# Altium PCB PCB2(SMA).PcbDoc
Units mm, origin at the board's own origin, x right, y up, seen from the top; angles counter-clockwise.
Board outline 112 x 58 mm, 2 copper layers (Top Layer, Bottom Layer), stack 1.57 mm thick; 106 components, 78 nets, 440 pads, 187 vias.
Unrouted connection lines stored in the file: 13.
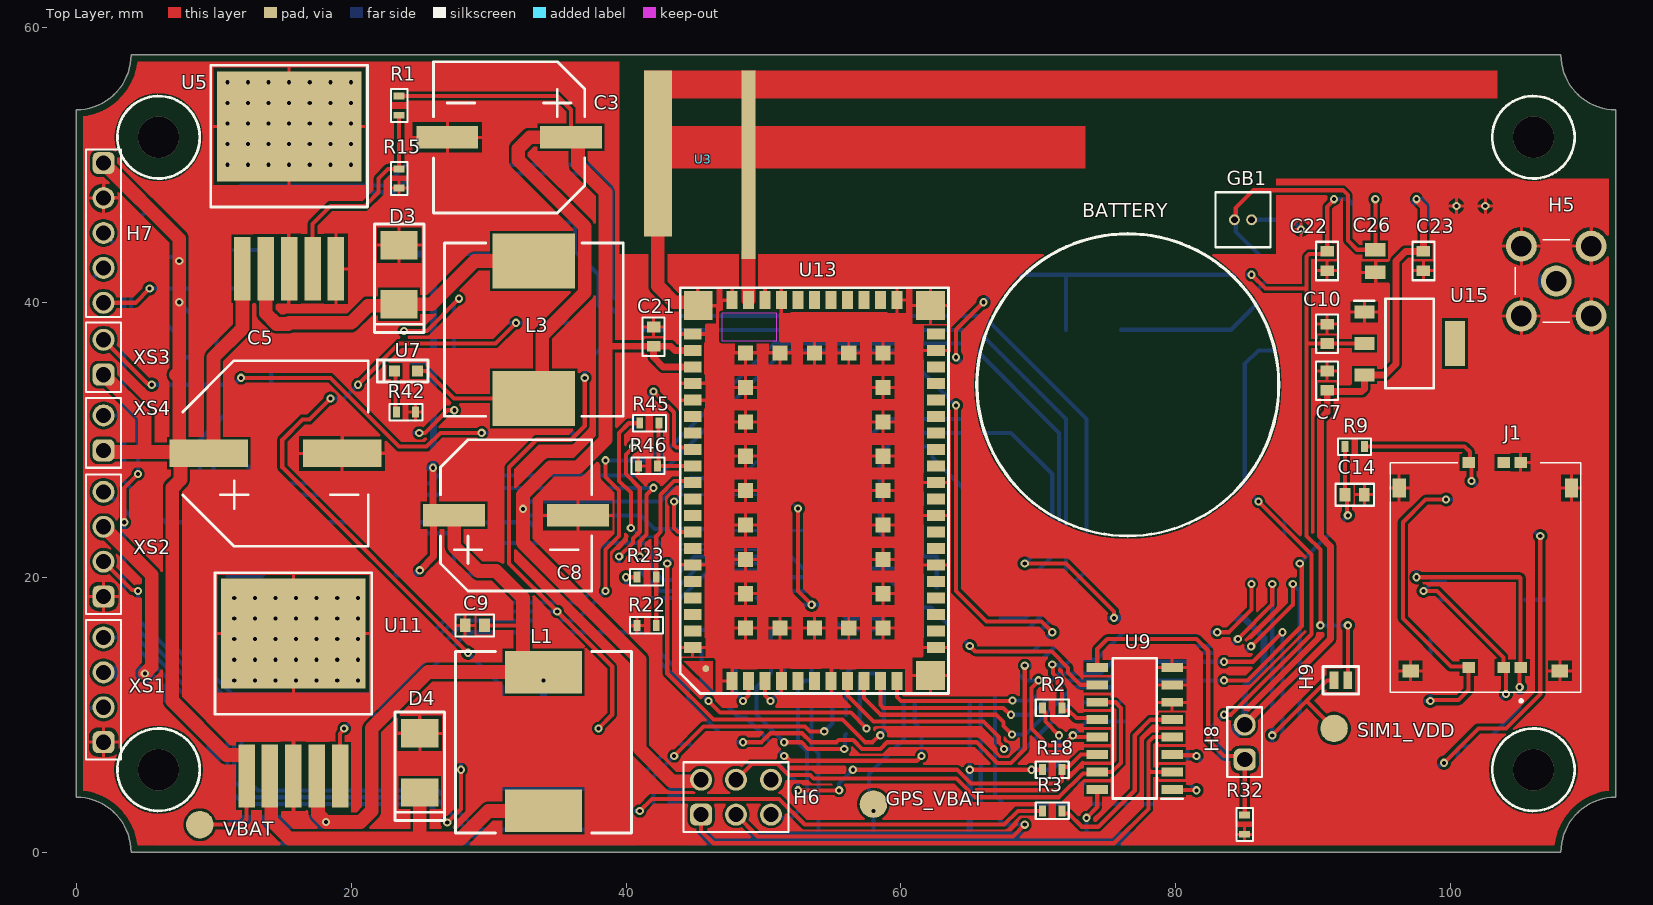
[diagram p0: Top Layer view]
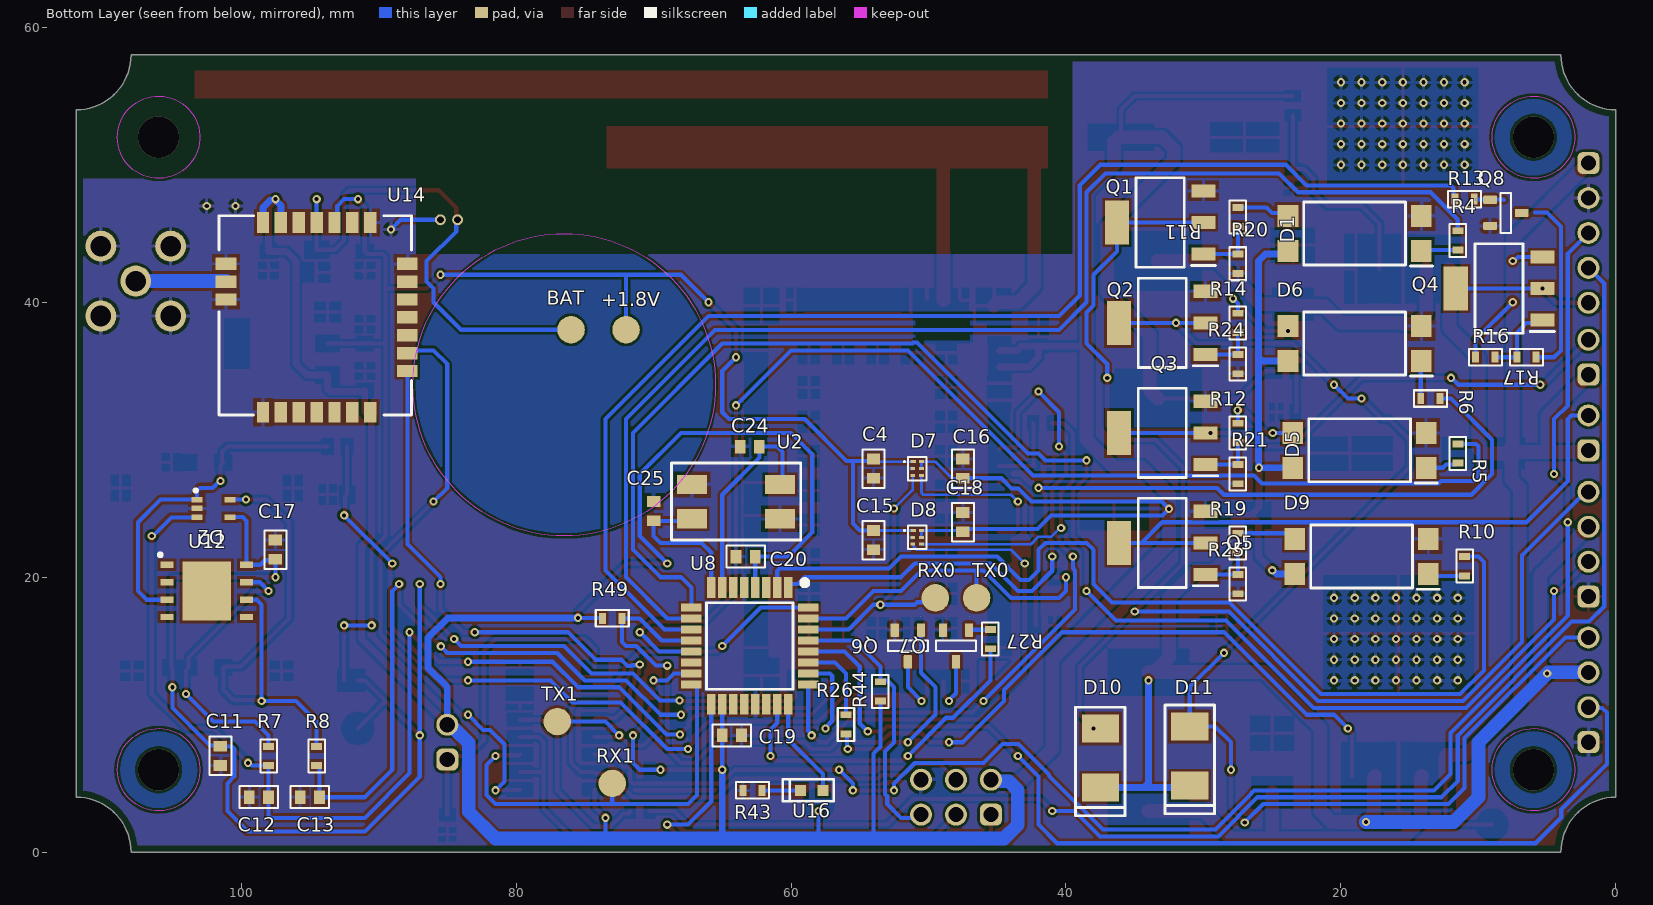
[diagram p1: Bottom Layer view, seen from below]

## Layer stack, top to bottom
Top Solder: solder mask 0.0102, Solder Resist, Dk 3.5
Top Layer: signal copper 0.035
Dielectric 1: dielectric 1.5, FR-4, Dk 4.8
Bottom Layer: signal copper 0.035
Bottom Solder: solder mask 0.0102, Solder Resist, Dk 3.5

## Board outline
0,4 cw(c0,0) 4,0 108,0 cw(c112,0) 112,4 112,54 cw(c112,58) 108,58 4,58 cw(c0,58) 0,54

## Design rules (kind name [scope] priority, off if disabled: settings)
BoardOutlineClearance [All] p1: gap=0.5 ignorepadtopadclearanceinfootprint=FALSE
Clearance [All] p1: gap=0.2 ignorepadtopadclearanceinfootprint=FALSE except(0: Arc-Hole Track-Hole SMDPad-Hole THPad-Hole Via-Hole Fill-Hole Poly-Hole Region-Hole Text-Hole)
HoleSize [All] p1: absolutevalues=TRUE maxlimit=3 minlimit=0.3 maxpercent=80.000 minpercent=20.000
PolygonConnect [All] p1: connectstyle=Relief reliefconductorwidth=0.254 reliefentries=4 polygonreliefangle="90 Angle" airgapwidth=0.254
RoutingVias [All] p1: holewidth=0.711 width=1.27 viastyle="Through Hole" minholewidth=0.3 minwidth=0.6 maxholewidth=0.711 maxwidth=1.27
SolderMaskExpansion [All] p1: expansion=0.102 istentingtop=FALSE
Width [All] p1: maxlimit=1 minlimit=0.2 preferedwidth=0.3 minimp=50.000000 maximp=50.000000 favimp=50.000000
29 further rules are at their usual default settings.

## Classes and differential pairs
component class Sheet2: D1 D5 D6 D9 D10 D11 H3 Q1 Q2 Q3 Q5 R4 R5 R6 R10 R11 R12 R14 R19 R20 R21 R24 R25 XS1 XS2 XS3 XS4
component class Sheet1: BAT C3 C4 C5 C7 C8 C9 C10 C11 C12 C13 C14 C15 C16 C17 C18 C19 C20 C21 C22 C23 C24 C25 C26 D2 D3 D4 D7 D8 GB1 H5 H6 H7 H8 H9 J1 L1 L3 Q4 Q6 Q7 Q8 R1 R2 R3 R7 R8 R9 R13 R15 R16 R17 R18 R22 R23 R26 R27 R32 R42 R43 R44 R45 R46 R49 RX0 RX1 TX0 TX1 U2 U3 U5 U7 U8 U9 U11 U12 U13 U14 U15 U16

## Components (designator, comment, footprint, x,y, rotation, side; value= is the part's Value field where it differs from the comment)
BAT "Pad" PAD#1 76,38 r180 bottom
C3 "1000uF" CP_SMD_BD10.0-L10.3_W10.3-LS11.0 36,52 r180 top
C4 "100nF" C_0603_(1608) 54,27.9 r90 bottom
C5 "100uF 80V" CP_D12.5_H13.5 14.5,29 r0 top
C7 "10 мкФ" C_0603_(1608) 91,34.3 r90 top
C8 "470uF" CP_SMD_BD10.0-L10.3_W10.3-LS11.0 27.5,24.5 r0 top
C9 "100nF" C_0603_(1608) 29,16.5 r0 top
C10 "10 мкФ" C_0603_(1608) 91,37.7 r90 top
C11 "100nF" C_0603_(1608) 101.5,7 r90 bottom
C12 "22pF" C_0603_(1608) 98.7,4 r180 bottom
C13 "22pF" C_0603_(1608) 95,4 r180 bottom
C14 "22pF" C_0603_(1608) 93,26 r180 top
C15 "100nF" C_0603_(1608) 54,22.7 r90 bottom
C16 "100nF" C_0603_(1608) 47.5,27.9 r270 bottom
C17 "100nF" C_0603_(1608) 97.5,22 r270 bottom
C18 "100nF" C_0603_(1608) 47.5,24 r270 bottom
C19 "100nF" C_0603_(1608) 64.3,8.5 r0 bottom
C20 "100nF" C_0603_(1608) 63.3,21.5 r180 bottom
C21 "100nF" C_0603_(1608) 42,37.5 r270 top
C22 "100nF" C_0603_(1608) 91,43 r90 top
C23 "100nF" C_0603_(1608) 98,43 r90 top
C24 "16pF" CAPC1608X97N 63,29.5 r0 bottom
C25 "16pF" CAPC1608X97N 70,24.8 r270 bottom
C26 "1uF" CAPC2012X145N 94.5,43 r90 top
D1 "EL817" SOP254P1030X390-4N 19,45 r0 bottom
D2 "ESDA6V1W5" SOT65P210X110-5N 102,25 r180 bottom
D3 "SK56" DIONM5236X261N 23.5,42 r90 top
D4 "SK56" DIONM5236X261N 25,6.5 r90 top
D5 "EL817" SOP254P1030X390-4N 18.65,29.23 r0 bottom
D6 "EL817" SOP254P1030X390-4N 19,37 r0 bottom
D7 "RS0101YUTDV6" DFN1.54x1.0-6L 51.15,28.4 r180 bottom
D8 "RS0101YUTDV6" DFN1.54x1.0-6L 51.15,23.4 r180 bottom
D9 "EL817" SOP254P1030X390-4N 18.5,21.5 r0 bottom
D10 "SK56" DIONM5236X261N 37.5,6.85 r90 bottom
D11 "SK56" DIONM5236X261N 31,7 r90 bottom
GB1 "CR2032" JST-2_1.25 84.875,46 r0 top
H5 "L-KLS1-SMA002-B" LKLS1SMA002B 107.66,41.54 r180 top
H6 "PLS_6" PLD-6 48,4 r0 top
H7 "PBS_5" "PBS-5 2.54" 2,50.12 r270 top
H8 "PLS_2 (jumper)" PLS-2 85,8 r90 top
H9 "Solder_jumper" Solder_Jumper 92.5,12.5 r180 top
J1 "78800-0001" 788000001 102.5,20 r90 top
L1 "B82477G4" B82477G4 34,3 r90 top
L3 "100uHn" Inductor_SMD 33.3,43 r270 top
Q1 "IRLL014NPBF" SOT-223(BCE) 33.15,45.8 r0 bottom
Q2 "IRLL014NPBF" SOT-223(BCE) 33,38.5 r0 bottom
Q3 "IRLL014NPBF" SOT-223(BCE) 33,30.5 r0 bottom
Q4 "BCP53-16,115," SOT-223(BCE) 8.5,41 r0 bottom
Q5 "IRLL014NPBF" SOT-223(BCE) 33,22.5 r0 bottom
Q6 "BF822,215" SOT23-3 51.5,15 r270 bottom
Q7 "BF822,215" SOT23-3 48,15 r270 bottom
Q8 "BF822,215" SOT23-3 8,46.5 r180 bottom
R1 "3.9k" R_0603_(1608) 23.5,54.3 r90 top
R2 "10k" R_0603_(1608) 71,10.5 r180 top
R3 "100 Ом" R_0603_(1608) 71,3 r180 top
R4 "36" R_0603_(1608) 11.5,44.5 r90 bottom
R5 "36" R_0603_(1608) 11.5,29 r90 bottom
R6 "36" R_0603_(1608) 13.5,33 r180 bottom
R7 "22" R_0603_(1608) 98,7 r270 bottom
R8 "22" R_0603_(1608) 94.5,7 r270 bottom
R9 "22" R_0603_(1608) 93,29.5 r180 top
R10 "36" R_0603_(1608) 11,20.8 r90 bottom
R11 "100" R_0603_(1608) 27.5,46.2 r270 bottom
R12 "100" R_0603_(1608) 27.5,30.5 r270 bottom
R13 "2.2k" R_0603_(1608) 11,47.5 r180 bottom
R14 "100" R_0603_(1608) 27.5,38.5 r270 bottom
R15 "2.2k" R_0603_(1608) 23.5,49 r90 top
R16 "1k" R_0603_(1608) 9.5,36 r0 bottom
R17 "10k" R_0603_(1608) 6.5,36 r0 bottom
R18 "10k" R_0603_(1608) 71,6 r180 top
R19 "100" R_0603_(1608) 27.5,22.5 r270 bottom
R20 "1k" R_0603_(1608) 27.5,42.8 r270 bottom
R21 "1k" R_0603_(1608) 27.5,27.5 r270 bottom
R22 "10k" R_0603_(1608) 41.5,16.5 r0 top
R23 "10k" R_0603_(1608) 41.5,20 r0 top
R24 "1k" R_0603_(1608) 27.5,35.5 r270 bottom
R25 "1k" R_0603_(1608) 27.5,19.5 r270 bottom
R26 "2.2k" R_0603_(1608) 56,9.3 r270 bottom
R27 "2.2k" R_0603_(1608) 45.5,15.5 r90 bottom
R32 "10k" R_0603_(1608) 85,2 r270 top
R42 "36" R_0603_(1608) 24,32 r180 top
R43 "36" R_0603_(1608) 62.8,4.5 r180 bottom
R44 "10k" R_0603_(1608) 53.5,11.7 r90 bottom
R45 "10k" R_0603_(1608) 41.7,31.2 r0 top
R46 "10k" R_0603_(1608) 41.6,28.1 r0 top
R49 "10k" R_0603_(1608) 73,17 r180 bottom
RX0 "Pad" PAD#2 49.5,18.5 r90 bottom
RX1 "Pad" PAD#2 73,5 r90 bottom
TX0 "Pad" PAD#2 46.5,18.5 r90 bottom
TX1 "Pad" PAD#2 77,9.5 r90 bottom
U2 "KX-13-7.37280MHz" XTALL_KX-13 64,25.5 r0 bottom
U3 "ANT_GPRS" ANT_GPRS 41.3,44.793 r0 top
U5 "LM2576HVR-ADJ" TO-263-5 12.1,42.433 r0 top
U7 "KP-1608QBC-D" KP1608QBCD 24,35 r0 top
U8 "ATmega328PB" QFP80P900X900X120-32N 63,15 r270 bottom
U9 "74HC4052D" SOIC127P600X175-16N 77,9 r180 top
U11 "LM2596HVGR-12" TO-263-5 12.4,5.533 r0 top
U12 "MFF2" SON127P600X500X90-9N-D 102.5,19 r180 bottom
U13 "ПН6280" ПН6280 43.95,41.05 r90 top
U14 "PRO-04" PRO-04_SMD 101.1,42.8 r180 bottom
U15 "AMS1117-1.8" SOT229P700X180-4N 97,37 r0 top
U16 "KP-1608QBC-D" KP1608QBCD 58.5,4.5 r180 bottom
XS1 "PLS-4" PLS-4 2,11.81 r90 top
XS2 "PLS-4" PLS-4 2,22.4 r90 top
XS3 "PLS-2" PLS-2 2,36 r90 top
XS4 "PLS-2" PLS-2 2,30.5 r90 top

## Footprints (in the part's own frame and the unit in brackets; to place one, negate y for a bottom-side part, rotate by r counter-clockwise, add the part's x,y. Pads: shape width x height; smd on the part's side, far side on the other; paste and mask are expansions set on the pad)
788000001 [mm]
  rect 0.8x0.9 smd: C1(-6.585,-2.57) C2(-6.585,-1.33) C3(-6.585,1.21) C5(8.355,-2.57) C6(8.355,-1.33) C7(8.355,1.21)
  rect 0.95x1.2 smd: MP1(-6.815,5.425) MP4(-6.815,-5.425)
  rect 1.4x0.95 smd: MP2(6.495,6.26) MP3(6.495,-6.26)
  silkscreen extent -9.1,-6.93 8.32,6.93, body extent -8.28,-6.93 8.68,6.93, height 1.51
ANT_GPRS [mil]
  rect 40x540 smd paste+0 mask+4: 1(300,205)
  rect 80x475 smd paste+0 mask+4: 2(39.98,237.5)
  Top Layer region: 0,395 2445,395 2445,475 0,475
  Top Layer region: 0,194.29 1265,194.29 1265,315.71 0,315.71
B82477G4 [mm]
  rect 3.1x5.6 smd paste+0: 1(0,0) 2(10.1,0)
  silkscreen extent -1.6,-6.4 11.6,6.4, body extent -1.4,-6.4 11.4,6.4, height 8
C_0603_(1608) [mm]
  rect 0.78x0.98 smd: 1(-0.7,0) 2(0.7,0)
  silkscreen extent -1.4,-0.8 1.4,0.8, body extent -0.8,-0.4 0.8,0.4, height 0.97
CAPC1608X97N [mm]
  rect 0.78x0.98 smd: 1(-0.7,0) 2(0.7,0)
  body extent -0.8,-0.4 0.8,0.4, height 0.97
CAPC2012X145N [mm]
  rect 0.99x1.47 smd: 1(-0.82,0) 2(0.82,0)
  body extent -1,-0.63 1,0.63, height 1.45
CP_D12.5_H13.5 [mm]
  rect 5.7x2 smd: 1(-4.85,0) 2(4.85,0)
  silkscreen extent -6.75,-6.75 6.75,6.75, body extent -6.25,-6.25 6.25,6.25, height 13.5
CP_SMD_BD10.0-L10.3_W10.3-LS11.0 [mm]
  rect 4.5x1.65 smd: 1(0,0) 2(9,0)
  silkscreen extent -1,-5.5 10,5.5, body extent -0.5,-5 9.5,5, height 10.5
DFN1.54x1.0-6L [mm]
  rect 0.4x0.22 smd paste+0: 1(0.025,0)
  rect 0.35x0.22 smd paste+0: 2(0,-0.5) 3(0,-1) 4(0.65,-1) 5(0.65,-0.5) 6(0.65,0)
  silkscreen extent -0.65,-1.35 1,0.35, body extent -0.18,-1.25 0.82,0.25, height 0.55
DIONM5236X261N [mm]
  rect 2.05x2.7 smd: 1(-2.15,0) 2(2.15,0)
  silkscreen extent -4.2,-1.8 3.7,1.8, body extent -2.59,-1.8 2.59,1.8, height 2.61
Inductor_SMD [mm]
  rect 4x6 smd paste+0: 1(0,0) 2(10,0)
  silkscreen extent -1.3,-6.5 11.3,6.5, body extent -1.3,-6.5 11.3,6.5, height 8
JST-2_1.25 [mm]
  round 0.8 hole 0.5: 1(-0.625,0) 2(0.625,0)
  silkscreen extent -2,-2 2,2, body extent -2,-1.6 2,1.6, height 4
KP1608QBCD [mm]
  rect 0.8x0.8 smd: 1(0.825,0) 2(-0.825,0)
  silkscreen extent -2.1,-0.8 1.6,0.8, body extent -0.8,-0.4 0.8,0.4, height 1.2
LKLS1SMA002B [mm]
  round 2.25 hole 1.5: 1(0,0) 2(-2.54,-2.54) 3(-2.54,2.54) 4(2.54,-2.54) 5(2.54,2.54)
  silkscreen extent -1,-3 3,3, body extent -11.5,-3.19 3.19,3.19, height 9.6
PAD#1 [mm]
  round 2 smd paste+0 mask+0.102: 1(0,0)
PAD#2 [mm]
  round 2 smd paste+0: 1(0,0)
"PBS-5 2.54" [mm]
  rrect50% 1.6x1.6 hole 1.1: 1(0,0)
  round 1.6 hole 1.1: 2(2.54,0) 3(5.08,0) 4(7.62,0) 5(10.16,0)
  silkscreen extent -1,-1.27 11.2,1.27, body extent -1,-1.27 11.2,1.27, height 4.3
PLD-6 [mm]
  rrect50% 1.6x1.6 hole 1.1: 1(-2.54,-1.27)
  round 1.6 hole 1.1: 2(-2.54,1.27) 3(0,-1.27) 4(0,1.27) 5(2.54,-1.27) 6(2.54,1.27)
  silkscreen extent -3.81,-2.54 3.81,2.54, body extent -3.81,-2.54 3.81,2.54, height 8.5
PLS-2 [mm]
  rrect50% 1.6x1.6 hole 1.1: 1(-1.27,0)
  round 1.6 hole 1.1: 2(1.27,0)
  silkscreen extent -2.54,-1.27 2.54,1.27, body extent -2.54,-1.27 2.54,1.27, height 8.5
PLS-4 [mm]
  rrect50% 1.6x1.6 hole 1.1: 1(-3.81,0)
  round 1.6 hole 1.1: 2(-1.27,0) 3(1.27,0) 4(3.81,0)
  silkscreen extent -5.08,-1.27 5.08,1.27, body extent -5.08,-1.27 5.08,1.27, height 8.5
PRO-04_SMD [mm]
  rect 1.5x0.9 smd: 1(0,0) 2(0,-1.3) 3(0,-2.6) 11(13.2,-7.8) 12(13.2,-6.5) 13(13.2,-5.2) 14(13.2,-3.9) 15(13.2,-2.6) 16(13.2,-1.3) 17(13.2,0)
  rect 0.9x1.5 smd: 4(2.7,-10.8) 5(4,-10.8) 6(5.3,-10.8) 7(6.6,-10.8) 8(7.9,-10.8) 9(9.2,-10.8) 10(10.5,-10.8) 18(10.5,3) 19(9.2,3) 20(7.9,3) 21(6.6,3) 22(5.3,3) 23(4,3) 24(2.7,3)
  round 1 on Bottom Overlay: -(-1.5,2.5)
  silkscreen extent -0.5,-11 13.5,3.5, body extent -0.5,-11 13.5,3.5, height 1.8
QFP80P900X900X120-32N [mm]
  rect 1.5x0.6 smd: 1(-4.25,2.8) 2(-4.25,2) 3(-4.25,1.2) 4(-4.25,0.4) 5(-4.25,-0.4) 6(-4.25,-1.2) 7(-4.25,-2) 8(-4.25,-2.8) 17(4.25,-2.8) 18(4.25,-2) 19(4.25,-1.2) 20(4.25,-0.4) 21(4.25,0.4) 22(4.25,1.2) 23(4.25,2) 24(4.25,2.8)
  rect 0.6x1.5 smd: 9(-2.8,-4.25) 10(-2,-4.25) 11(-1.2,-4.25) 12(-0.4,-4.25) 13(0.4,-4.25) 14(1.2,-4.25) 15(2,-4.25) 16(2.8,-4.25) 25(2.8,4.25) 26(2,4.25) 27(1.2,4.25) 28(0.4,4.25) 29(-0.4,4.25) 30(-1.2,4.25) 31(-2,4.25) 32(-2.8,4.25)
  silkscreen extent -4.8,-3.15 3.15,4.2, body extent -4.5,-4.5 4.5,4.5, height 1.2
R_0603_(1608) [mm]
  rect 0.5x0.8 smd: 1(-0.7,0) 2(0.7,0)
  silkscreen extent -1.2,-0.6 1.2,0.6, body extent -0.7,-0.41 0.7,0.41, height 0.45
SOIC127P600X175-16N [mm]
  rect 1.55x0.65 smd: 1(-2.725,4.445) 2(-2.725,3.175) 3(-2.725,1.905) 4(-2.725,0.635) 5(-2.725,-0.635) 6(-2.725,-1.905) 7(-2.725,-3.175) 8(-2.725,-4.445) 9(2.725,-4.445) 10(2.725,-3.175) 11(2.725,-1.905) 12(2.725,-0.635) 13(2.725,0.635) 14(2.725,1.905) 15(2.725,3.175) 16(2.725,4.445)
  silkscreen extent -3.5,-5.1 1.6,5.12, body extent -3,-5.1 3,5.1, height 1.75
Solder_Jumper [mm]
  rect 0.635x1.27 smd: 1(0,0) 2(1,0)
  silkscreen extent -0.8,-1 1.8,1
SON127P600X500X90-9N-D [mm]
  rect 0.95x0.45 smd: 1(-2.9,1.905) 2(-2.9,0.635) 3(-2.9,-0.635) 4(-2.9,-1.905) 5(2.9,-1.905) 6(2.9,-0.635) 7(2.9,0.635) 8(2.9,1.905)
  rect 3.5x4.3 smd: 9(0,0)
  silkscreen extent -3.5,2.51 -3.25,2.75, body extent -3.05,-2.5 3.05,2.5, height 0.9
SOP254P1030X390-4N [mm]
  rect 1.5x1.6 smd: 1(-4.85,1.27) 2(-4.85,-1.27) 3(4.85,-1.27) 4(4.85,1.27)
  silkscreen extent -5.65,-2.29 3.7,2.37, body extent -5.15,-2.29 5.15,2.29, height 3.9
SOT23-3 [mm] "SOT23, 3 pin"
  rrect25% 1x0.6 smd: 1(-1.15,0.95) 2(-1.15,-0.95) 3(1.15,0)
  silkscreen extent -0.38,-1.45 0.38,1.45, body extent -1.4,-1.45 1.4,1.45, height 1.29
SOT65P210X110-5N [mm]
  rect 0.8x0.4 smd: 1(-1.2,0.65) 2(-1.2,0) 3(-1.2,-0.65) 4(1.2,-0.65) 5(1.2,0.65)
  silkscreen extent -1.4,1.2 -1.2,1.4, body extent -1.05,-1 1.05,1, height 1.1
SOT229P700X180-4N [mm]
  rect 1.45x0.95 smd: 1(-3.3,2.29) 2(-3.3,0) 3(-3.3,-2.29)
  rect 1.45x3.25 smd: 4(3.3,0)
  silkscreen extent -4.03,-3.25 1.75,3.25, body extent -3.35,-3.15 3.35,3.15, height 1.8
SOT-223(BCE) [mm]
  rect 1.75x0.95 smd: 1(-3.15,2.3) 2(-3.15,0) 3(-3.15,-2.3)
  rect 1.75x3.2 smd: 2(3.15,0)
  silkscreen extent -4.03,-3.25 1.75,3.25, body extent -3.5,-3.25 3.5,3.25, height 1.68
TO-263-5 [mm]
  rect 1.2x4.6 smd: 1(0,0) 2(1.7,0) 3(3.4,0) 4(5.1,0) 5(6.8,0)
  rect 10.5x8 smd: 6(3.4,10.367)
  silkscreen extent -2.3,4.5 9.1,14.8, body extent -2,-1.1 8.8,14.5, height 4.4
XTALL_KX-13 [mm]
  rect 2.2x1.4 smd paste+0: 1(-3.2,-1.25) 2(3.2,-1.25) 3(3.2,1.25) 4(-3.2,1.25)
  silkscreen extent -4.7,-2.8 4.7,2.8, body extent -3.5,-2.48 3.5,2.48, height 1.3
ПН6280 [mm]
  rect 1.3x0.8 smd: 1(-28.6,-3.75) 2(-28.6,-4.95) 3(-28.6,-6.15) 4(-28.6,-7.35) 5(-28.6,-8.55) 6(-28.6,-9.75) 7(-28.6,-10.95) 8(-28.6,-12.15) 9(-28.6,-13.35) 10(-28.6,-14.55) 11(-28.6,-15.75) 32(-0.9,-15.75) 33(-0.9,-14.55) 34(-0.9,-13.35) 35(-0.9,-12.15) 36(-0.9,-10.95) 37(-0.9,-9.75) 38(-0.9,-8.55) 39(-0.9,-7.35) 40(-0.9,-6.15) 41(-0.9,-4.95) 42(-0.9,-3.75)
  rect 0.8x1.3 smd: 12(-26.15,-18.6) 13(-24.95,-18.6) 14(-23.75,-18.6) 15(-22.55,-18.6) 16(-21.35,-18.6) 17(-20.15,-18.6) 18(-18.95,-18.6) 19(-17.75,-18.6) 20(-16.55,-18.6) 21(-15.35,-18.6) 22(-14.15,-18.6) 23(-12.95,-18.6) 24(-11.75,-18.6) 25(-10.55,-18.6) 26(-9.35,-18.6) 27(-8.15,-18.6) 28(-6.95,-18.6) 29(-5.75,-18.6) 30(-4.55,-18.6) 31(-3.35,-18.6) 43(-3.35,-0.9) 44(-4.55,-0.9) 45(-5.75,-0.9) 46(-6.95,-0.9) 47(-8.15,-0.9) 48(-9.35,-0.9) 49(-10.55,-0.9) 50(-11.75,-0.9) 51(-12.95,-0.9) 52(-14.15,-0.9) 53(-15.35,-0.9) 54(-16.55,-0.9) 55(-17.75,-0.9) 56(-18.95,-0.9) 57(-20.15,-0.9) 58(-21.35,-0.9) 59(-22.55,-0.9) 60(-23.75,-0.9) 61(-24.95,-0.9) 62(-26.15,-0.9)
  round 0.5 smd: 63(-27.7,-1.85)
  rect 2.1x2.1 smd: 64(-28.2,-18.2) 65(-1.3,-18.2) 66(-1.3,-1.3)
  rect 1.1x1.1 smd: 67(-24.75,-4.75) 68(-22.25,-4.75) 69(-19.75,-4.75) 70(-17.25,-4.75) 71(-14.75,-4.75) 72(-12.25,-4.75) 73(-9.75,-4.75) 74(-7.25,-4.75) 75(-4.75,-4.75) 76(-4.75,-7.25) 77(-4.75,-9.75) 78(-4.75,-12.25) 79(-4.75,-14.75) 80(-7.25,-14.75) 81(-9.75,-14.75) 82(-12.25,-14.75) 83(-14.75,-14.75) 84(-17.25,-14.75) 85(-19.75,-14.75) 86(-22.25,-14.75) 87(-24.75,-14.75) 88(-24.75,-12.25) 89(-24.75,-9.75) 90(-24.75,-7.25)
  round 0.5 on Top Overlay: -(-29.5,-0.25)
  Top Layer region: -27.15,-2.35 -27.15,-0.25 -29.25,-2.35
  Top Layer keep-out region: -1.85,-3.005 -3.85,-3.005 -3.85,-7.005 -1.85,-7.005
  silkscreen extent -29.5,-19.5 0,0, body extent -29.45,-19.5 0,0, height 1.65

## Part data
C3 C8: library part CapPol
C4 C9 C11 C12 C13 C14 C15 C16 C17 C18 C19 C20 C21 C22 C23 C24 C25 C26: library part Cap
C5: library part CapPol, "https://www.chipdip.ru/product0/9000565895"
C7 C10: library part C, "https://www.chipdip.ru/product/grm188r60j106me47d?utm_source=direct&utm_medium=cpc&position_type=premium%7Ck50id%7C010000002888725_2888725%7Ccid%7C78738975%7Cgid%7C5038974208%7Caid%7C12817036899%7Csrc%7Csearch_none&utm_campaign=Y_dinamika_site&utm_content=text1_ya&utm_term=&_openstat=ZGlyZWN0LnlhbmRleC5ydTs3ODczODk3NTsxMjgxNzAzNjg5OTt5YW5kZXgucnU6cHJlbWl1bQ&yclid=7086227334585909247", tolerance=20%, Copmonent kind=X5R, smd size=0603, Type="Керамич. чип-конденсатор", U max="6.3 В"
D1 D5 D6 D9: library part OPTRONE_NPN, Type="Оптопара транзисторная"
D3 D4 D10 D11: library part Schottky, "https://www.chipdip.ru/product/sk56"
D7 D8: "https://www.chipdip.ru/product0/8011065169", Package=[DFN1.45x1.0-6L], Type="Преобразователь уровней"
GB1: library part BATTERY, "https://www.chipdip.ru/product0/9000808758 /  / JST-2 1.25мм"
H5: library part PLS_5, "https://www.chipdip.ru/product/kls1-sma002-b-sma-jr"
H7: library part PLS_5
H8 H9: library part PLS_2
J1: library part 78800
L1 L3: library part Inductor
Q4: library part TRANS-PNP, "https://www.chipdip.ru/product/bcp53-16-nxp"
Q6 Q7 Q8: library part TRANS-NPN, "https://www.chipdip.ru/product/bf822-215"
R1 R2 R3 R4 R5 R6 R7 R8 R9 R10 R11 R12 R13 R14 R15 R16 R17 R18 R19 R20 R21 R22 R23 R24 R25 R26 R27 R32 R42 R43 R44 R45 R46 R49: library part R
U2: library part XTALL_KX-13, "https://www.elitan.ru/price/item348176"
U3: "PCB_ant"
U7 U16: library part LED
U15: library part AMS1117-3.3, "https://www.chipdip.ru/product/ams1117-1.8"
XS1 XS2: library part XS4
XS3 XS4: library part XS2

## Free pads (board coordinates)
  round 2 smd paste+0 mask+0.102: 2(58,3.5) 3(9,2) 4(91.5,9)
  round 2 smd far side paste+0 mask+0.102: 6(72,38)

## Via types
v1: diameter 0.6, hole 0.3, Top Layer to Bottom Layer, 183 vias
v2: diameter 3, hole 3, Top Layer to Bottom Layer, 4 vias

## Nets (pads, with @x,y where several pads share a name; then routed paths per layer and width w, separated by ;. In a path a pad name is that pad's centre, name@x,y a point inside that pad or via, vN(x,y) a via of type N, cw(c..) or ccw(c..) an arc to the next point about the centre after c; other vN are vias at no path point)
+1,8V: C4.2 C10.1 C15.2 C22.2 D7.1 D8.1 H9.1 pad.6 U14.20 U15.2 | length 108.2
  Top Layer w0.3: v1(64,36) 64,38 v1(66,40) ; v1(85.5,42) 86.5,41 89.5,41 ; v1(90.5,16.5) 90.5,22 89.5,23 89.5,37 ; v1(91.5,47.5) 91.5,47.439 91,46.939 C22.2 90.8,43.5 89.676,43.5 89.5,43.324 89.5,41 ; H9.1 v1(92.5,16.5) ; U15.2 C10.1 89.5,37 ; 89.5,37 89.5,41
  Bottom Layer w0.2: D8.1 C15.2 ; D7.1 C4.2@53.8,28.4
  Bottom Layer w0.3: C15.2 55,23.4 55.5,23.9 55.5,28.457 ; C4.2@54.143,28.457 55.5,28.457 ; v1(64,36) 65,35 65,32 64.5,31.5 59,31.5 55.957,28.457 55.5,28.457 ; v1(66,40) 68,42 72,42 ; pad.6 72,42 ; v1(85.5,42) 72,42 ; v1(90.5,16.5) v1(92.5,16.5) ; v1(91.5,47.5) 92.5,47.5 93,47 93,46 U14.20
+12V: C8.1 C9.2 D1.4 D5.4 D6.4 D9.4 D10.1 D11.1 L1.2 U11.4 XS1.3 XS2.3 | length 128.2
  Top Layer w0.3: C9.2 32.325,16.5 32.5,16.325
  Top Layer w0.5: v1(25,20.5) 26,21.5 26,23.925 C8.1@26.575,24.5 ; v1(25.96,27.96) 25.96,25.075 26.535,24.5 C8.1@26.575,24.5 ; C8.1 C8.1@26.575,24.5
  Top Layer w1: XS2.3 5.5,20.17 5.5,13.5 v1(5,13) ; U11.4 17.6,5.433 17.6,2.786 v1(18.186,2.2) 20.7,2.2 21.5,3 21.5,9 25.6,13.1 L1.2@33.55,13.1 ; C8.1 27.5,22.222 29.264,20.458 30.542,20.458 32.5,18.5 32.5,16.325 32.5,14.15 L1.2@33.55,13.1 ; L1.2 L1.2@33.55,13.1
  Bottom Layer w0.5: D9.4 24.703,20.23 24.973,20.5 v1(25,20.5) ; D5.4 v1(25.96,27.96) 25.979,27.979 25.979,28.489 26,28.51 26,36 ; D6.4 25.73,35.73 26,36 ; D1.4 24.08,43.5 25.5,43.5 26,43 26,36 ; D11.1 31.15,4.7 34.325,4.7 ; v1(34,12.5) 34,5.025 34.325,4.7 ; D10.1 34.325,4.7
  Bottom Layer w1: XS1.3 4.92,13.08 10,8 10,4 11.8,2.2 v1(18.186,2.2)
Bat: BAT.1 C26.2 GB1.1 U14.21 | length 38.7
  Top Layer w0.3: GB1.1 84.346,46.096 84.346,46.846 85.65,48.15 92.149,48.15 92.5,47.799 92.5,44.5 93.18,43.82 C26.2 v1(94.5,47.5)
  Bottom Layer w0.3: BAT.1 84,38 86,40 86,41 86.5,41.5 86.5,43 84.346,45.154 84.346,45.904 GB1.1 ; U14.21 v1(94.5,47.5)
DRIVE: R13.1 U8.11 | length 94.6
  Bottom Layer w0.3: R13.1 11.8,47.6 11.8,48.3 12,48.5 22.5,48.5 24,50 37.5,50 39,48.5 39,40.5 40.5,39 66,39 73.5,31.5 73.5,20.5 69.2,16.2 U8.11
GND: C3.2 C4.1 C5.2 C7.2 C8.2 C9.1 C10.2 C11.1 C12.1 C13.1 C14.1 C15.1 C16.1 C17.1 C18.1 C19.1 C20.1 C21.1 C22.1 C23.1 C24.2 C25.1 C26.1 D1.2 D2.2 D3.2 D4.2 D5.2 D6.2 D7.2 D8.2 D9.2 GB1.2 H5.2 H5.3 H5.4 H5.5 H6.6 H7.2 J1.C5 J1.MP1 J1.MP2 J1.MP3 J1.MP4 Q1.3 Q2.3 Q3.3 Q5.3 Q6.2 Q7.2 Q8.2 R15.1 R20.2 R21.2 R22.1 R24.2 R25.2 R32.2 R42.1 R43.1 R46.1 U2.2 U2.4 U3.2 U5.3 U5.5 U5.6 U8.5 U8.21 U9.6 U9.7 U9.8 U11.3 U11.6 U13.1 U13.4 U13.7 U13.12 U13.17 U13.20 U13.22 U13.30 U13.32 U13.39 U13.40 U13.42 U13.43 U13.46 U13.47 U13.57 U13.62 U13.63 U13.64 U13.65 U13.66 U13.67 U13.68 U13.69 U13.70 U13.71 U13.72 U13.73 U13.74 U13.75 U13.76 U13.77 U13.78 U13.79 U13.80 U13.81 U13.82 U13.83 U13.84 U13.85 U13.86 U13.87 U13.88 U13.89 U13.90 U14.1 U14.3 U14.4 U14.17 U14.18 U15.1 XS1.1 XS2.1 | length 17.7
  Top Layer w0.3: C22.1@90.9,42.2 C22.1 C22.1@91.1,42.2 ; C23.1@97.9,42.4 C23.1
  Top Layer w1: U3.2@42.5,50.641 U3.2 42.316,41.184 43.5,40 45,40 U13.66
  Bottom Layer w0.3: GB1.2 88.4,46 v1(89.1,45.3)
  other v1: 11.5,12.5 13,12.5 14.5,12.5 16,12.5 17.5,12.5 19,12.5 20.5,12.5 11.5,14 13,14 14.5,14 16,14 17.5,14 19,14 20.5,14 11.5,15.5 13,15.5 14.5,15.5 16,15.5 17.5,15.5 19,15.5 20.5,15.5 11.5,17 13,17 14.5,17 16,17 17.5,17 19,17 20.5,17 11.5,18.5 13,18.5 14.5,18.5 16,18.5 17.5,18.5 19,18.5 20.5,18.5 100.4,47 102.5,47 11,50 12.5,50 14,50 15.5,50 17,50 18.5,50 20,50 11,51.5 12.5,51.5 14,51.5 15.5,51.5 17,51.5 18.5,51.5 20,51.5 11,53 12.5,53 14,53 15.5,53 17,53 18.5,53 20,53 11,54.5 12.5,54.5 14,54.5 15.5,54.5 17,54.5 18.5,54.5 20,54.5 11,56 12.5,56 14,56 15.5,56 17,56 18.5,56 20,56
GPS_VBAT: C3.1 C7.1 C16.2 C18.2 C19.2 C20.2 C21.2 C23.2 D7.5 D7.6 D8.5 D8.6 H6.2 H8.2 L3.2 pad.2 R1.2 R2.2 R18.2 R44.1 R49.1 U7.1 U8.4 U8.18 U9.16 U13.44 U13.45 U14.23 U14.24 U15.3 | length 363.5
  Top Layer w0.3: R1.2 35,55 36,54 C3.1 ; U7.1 25.5,35 27.5,33 L3.2 ; v1(65,6) R18.2 ; v1(69,21) 72,21 75.496,17.504 75.496,17.05 v1(75.5,17.046) ; R2.2 70.3,10.35 70.5,10.15 70.5,9.5 v1(71.5,8.5) ; v1(73.5,2.5) 74.275,3.275 U9.16 ; v1@97.5,47.439 v1(97.5,47.5)
  Top Layer w0.5: 38.5,37 38.7,36.8 C21.2 ; U13.45 42.7,35.3 42,36 C21.2 ; U13.44 43.552,36.5 43.252,36.8 C21.2 ; H8.2 91.25,15.52 91.25,22.25 90.5,23 90.5,31.5 91,32 C7.1 ; C7.1@91.407,33.5 93.5,33.5 93.7,33.7 U15.3 95.21,34.71 96,35.5 96,43 96.7,43.7 C23.2 98,46.939 v1@97.5,47.439
  Top Layer w1: L3.2 33.914,33.614 33.914,37.624 37,40.71 37,45.5 32.164,50.336 32.164,51.164 33,52 C3.1 36.175,52 36.5,51.675 36.5,50 38.5,48 38.5,37 38.5,30 36.5,28 34.5,28 32.5,26 v1(32.5,24.975) 32.5,22.5 41,14 41,7.5 43.346,5.154 45.345,5.155 H6.2
  Bottom Layer w0.2: C16.2 48.3,27.2 49.5,28.4 D7.6 D7.5 ; C18.2@47.67,23.5 47.77,23.4 D8.6 D8.5
  Bottom Layer w0.3: C16.2 44.7,27.2 43.95,26.45 43.45,26.45 42.5,25.5 33.036,25.5 32.511,24.975 v1(32.5,24.975) 32.975,24.5 41.081,24.5 42.081,23.5 C18.2@47.67,23.5 ; R44.1 53.5,7.671 54,7.171 54,1 ; 58,1 v1(58,3) ; U8.4 C20.2 60.2,21.5 58.459,23.241 58.459,28.959 60,30.5 68,30.5 71,27.5 71,23 v1(69,21) ; v1(65,6) C19.2 U8.18 ; v1(69.5,6) 71,6 71.5,6.5 v1(71.5,8.5) ; 73.5,1 v1(73.5,2.5) ; R49.1 73.723,17.023 75.477,17.023 v1(75.5,17.046) ; v1@97.5,47.419 v1(97.5,47.5) 97.557,47.443 97.857,47.443
  Bottom Layer w0.5: 65,1 v1(65,6) ; v1(75.5,17.046) 84.954,17.046 86.4,15.6 86.4,13.4 85,12 85,9.432 H8.2 ; U14.23 97.1,47.019 v1@97.5,47.419 ; 97.857,47.443 98.4,46.9 U14.24
  Bottom Layer w1: H6.2 45.345,5.155 44.155,5.155 43.5,4.5 43.5,2 44.5,1 54,1 58,1 65,1 73.5,1 81.5,1 83.441,2.941 83.441,7.941 84.47,8.97 84.538,8.97 H8.2@85,9.432
GSM_PWRKEY: R27.1 U8.23 | length 24.8
  Top Layer w0.3: v1(51.5,7) 51.581,7 51.931,6.65 61.15,6.65 v1(61.5,7)
  Bottom Layer w0.3: R27.1 45.5,12.5 48.221,9.779 48.721,9.779 v1(51.5,7) ; U8.23 61,9.411 61.5,8.911 v1(61.5,7)
GSM_RESET: R26.1 U8.27 | length 6.1
  Bottom Layer w0.3: R26.1 56,13 56.8,13.8 U8.27
GSM_RTS: D8.3 U8.25 | length 38.4
  Top Layer w0.3: v1(43,21) 43,13 46.35,9.65 55.732,9.65 57.382,8 57.939,8 58.439,8.5 v1(58.5,8.5)
  Bottom Layer w0.2: v1(43,21) 44,22 50.191,22 50.201,21.99 50.827,21.99 51.075,22.238 51.075,22.39 51.085,22.4 D8.3
  Bottom Layer w0.3: v1(58.5,8.5) 58.5,8.581 58.75,8.831 U8.25
GSM_TXD: D7.3 RX0.1 U8.30 | length 20.6
  Top Layer w0.3: v1(52.5,25) 52.5,19 v1(53.5,18)
  Bottom Layer w0.2: D7.3 51.15,26.35 v1(52.5,25)
  Bottom Layer w0.3: RX0.1 49.825,18.175 50.825,18.175 51,18 v1(53.5,18) 54,18 55.8,16.2 U8.30
LID: U8.28 XS1.2 | length 76.6
  Top Layer w0.3: v1(43.5,7) 45.65,9.15 53.013,9.15 53.373,8.79 v1(54.42,8.79)
  Bottom Layer w0.3: XS1.2 1.96,10.5 1,10.5 0.65,10.15 0.65,6.425 3.976,3.099 3.976,2.524 5.85,0.65 40.65,0.65 42,2 42,5.5 v1(43.5,7) ; v1(54.42,8.79) 55,9.37 55,13.5 56.1,14.6 U8.28
LOCK: U8.9 XS2.2 | length 110.6
  Top Layer w0.3: XS2.2 4.073,19.057 4.443,19.057 v1(4.5,19) ; v1(38.5,19) 38.5,22 39.5,23 39.5,26.293 38.5,27.293 v1(38.5,28.5)
  Bottom Layer w0.3: v1(4.5,19) 4.5,16.914 10.914,10.5 22,10.5 28.35,16.85 36.35,16.85 v1(38.5,19) ; v1(38.5,28.5) 41.5,28.5 42,29 42.755,29 50.831,37.076 51.079,37.076 51.155,37 65,37 71.5,30.5 71.5,22 69.5,20 68,20 67.25,19.25 U8.9
MISO: H6.1 U9.2 U9.4 | length 43.7
  Top Layer w0.3: H6.1 45.46,1.54 46.35,0.65 75.5,0.65 78,3.15 78,6 ; U9.2 78.175,5.825 78,6 ; U9.4 78.365,8.365 78,8 78,6
MK_RX1: RX1.1 U8.16 U9.3 | length 30.8
  Top Layer w0.3: U9.3 79.772,7.047 81.453,7.047 v1(81.5,7)
  Bottom Layer w0.3: U8.16@67.15,12.2 67,12.2 66.85,12.05 66.85,4.15 67.5,3.5 73,3.5 ; RX1.1@73.312,5 RX1.1 73,3.5 ; v1(81.5,7) 82.15,6.35 82.15,4.15 81.5,3.5 73,3.5
MK_TX1: TX1.1 U8.15 U9.13 | length 17.2
  Top Layer w0.3: v1(70,12.5) 70,12.439 69.5,11.939 69.5,9 70.743,7.757 71.757,7.757 v1(72.5,8.5) ; v1@72.5,8.365 U9.13
  Bottom Layer w0.3: U8.15 68.519,13 69.019,12.5 v1(70,12.5) ; v1(72.5,8.5) 73.5,9.5 TX1.1
MOSI: H6.4 U9.11 U9.15 | length 36.4
  Top Layer w0.3: H6.4 49.15,6.42 51.015,6.42 51.285,6.15 51.286,6.15 51.833,5.604 53.396,5.604 53.65,5.35 64.024,5.35 65.374,4 71.5,4 73.232,5.732 74.182,5.732 U9.15 75.325,5.825 76,6.5 76,10.5 75.595,10.905 U9.11
NetC24_1: C24.1 U2.1 U8.7 | length 15.6
  Bottom Layer w0.3: U2.1 60.624,26.926 60.624,29.124 61,29.5 C24.1 62.3,28.7 65,26 U8.7
NetC25_2: C25.2 U2.3 U8.8 | length 11.4
  Bottom Layer w0.3: U8.8 65.8,21.8 66.5,22.5 69.5,22.5 70,23 C25.2 67.5,24.1 U2.3@67.35,24.1 ; U2.3 U2.3@67.35,24.1 ; U2.3@67.5,23.95 U2.3@67.35,24.1
NetD1_1: D1.1 R4.1 | length 2.7
  Bottom Layer w0.3: R4.1 14.08,43.8 D1.1
NetD1_3: D1.3 R11.1 | length 3.9
  Bottom Layer w0.3: D1.3 24.08,46.5 25,46.5 25.4,46.9 R11.1
NetD2_1: D2.1 J1.C7 R9.1 U12.3 | length 25.1
  Top Layer w0.3: R9.1 101,29.5 101.376,29.124 101.376,28.441 J1.C7 101.5,28.145 v1(101.5,27)
  Bottom Layer w0.3: v1(101.5,27) 101.561,27 102.061,26.5 103,26.5 103.2,26.3 D2.1 105.85,25.65 107.5,24 107.5,19 106.865,18.365 U12.3
NetD2_5: D2.5 J1.C3 R8.1 U12.6 | length 37.7
  Top Layer w0.3: v1(98.5,11) 98.557,11.057 100.557,11.057 101.29,11.79 J1.C3 ; v1(99.65,25.65) 98.15,25.65 96.5,24 96.5,17 100,13.5 101.205,13.5 J1.C3@101.205,13.38
  Bottom Layer w0.3: R8.1 94.5,9.5 96,11 v1(98.5,11) 98.5,18 98.864,18.364 U12.6 ; v1(99.65,25.65) D2.5
NetD3_1: D3.1 L3.1 U5.2 | length 25
  Top Layer w1: U5.2 13.8,39.2 14.586,38.414 15.414,38.414 15.5,38.5 20,38.5 21.236,39.736 23.386,39.736 D3.1 25.85,39.85 29,43 L3.1
NetD4_1: D4.1 L1.1 U11.2 | length 27.8
  Top Layer w1: U11.2 14.2,5.433 14.2,2.3 15.5,1 25,1 ; D4.1 25,1 ; L1.1 30,3 28,1 25,1
NetD5_1: D5.1 R5.1 | length 2.4
  Bottom Layer w0.3: R5.1 11.595,28.205 12.35,28.205 12.595,27.96 D5.1
NetD5_3: D5.3 R12.1 | length 5.6
  Top Layer w0.3: v1(24.956,30.496) 25.375,30.496 27.024,32.144 v1(27.512,32.144)
  Bottom Layer w0.3: D5.3 23.504,30.496 v1(24.956,30.496) ; R12.1 27.5,32.132 v1(27.512,32.144)
NetD6_1: D6.1 R6.1 | length 3.1
  Bottom Layer w0.3: D6.1@13.92,35.5 D6.1 14.2,35.68 R6.1
NetD6_3: D6.3 R14.1 | length 6.2
  Top Layer w0.3: v1(23.848,37.916) 25.514,37.916 v1(27.859,40.261)
  Bottom Layer w0.3: R14.1 27.5,39.901 v1(27.859,40.261)
NetD9_1: D9.1 R10.1 | length 2.7
  Bottom Layer w0.3: R10.1 13.52,20.1 D9.1
NetD9_3: D9.3 R19.1 | length 4.3
  Bottom Layer w0.3: D9.3 23.78,23.2 R19.1
NetD10_2: D10.2 Q1.2 XS2.4 | length 97.6
  Top Layer w0.3: v1(37,34.5) 37,31 36,30 33.5,30 31.5,28 31.5,21 v1(35,17.5) 39,13.5 39,10 v1(38,9)
  Bottom Layer w0.3: XS2.4 2.209,26.21 6.825,21.594 6.825,15.296 11.121,11 21.656,11 28.156,17.5 v1(35,17.5) ; Q1.2@30,45.8 36.3,45.8 36.3,43.7 38,42 38,39.75 38.5,39.25 38.5,37 37,35.5 v1(37,34.5)
NetD11_2: D11.2 Q2.2 XS1.4 | length 96.7
  Top Layer w0.3: v1(18.5,33) 16.971,31.471 16.471,31.471 15,30 15,28 v1(28.5,14.5) ; v1(20.5,34) 23.5,37 30.5,37 v1(32,38.5) ; v1(27,2.15) 28,3.15 v1(28,6)
  Bottom Layer w0.3: XS1.4 3.673,15.62 11,8.293 11,4.676 12.176,3.5 25.65,3.5 v1(27,2.15) ; v1(18.5,33) 19.5,33 v1(20.5,34) ; v1(28,6) 28,8 29.15,9.15 D11.2 31,12 v1(28.5,14.5) ; Q2.2@29.85,38.5 v1(32,38.5) Q2.2@36.15,38.5
NetH5_1: H5.1 U14.2 | length 6.6
  Bottom Layer w1: U14.2@101.1,41.54 H5.1 H5.1@107.63,41.57
NetH7_4: H7.4 R3.2 | length 105.7
  Top Layer w0.3: v1(41,3) 41.88,3.88 51.12,3.88 53,2 67.5,2 68.5,3 R3.2
  Bottom Layer w0.3: H7.4 0.85,41.35 0.85,17.879 1.959,16.77 3.23,16.77 11.5,8.5 11.5,5.176 12.676,4 26.069,4 28.919,1.15 37.527,1.15 39.377,3 v1(41,3)
NetH7_5: H7.5 Q4.2 | length 10.1
  Top Layer w0.3: H7.5 4.31,39.96 v1(5.35,41)
  Bottom Layer w0.3: v1(5.35,41) Q4.2@11.65,41
NetH8_1: H8.1 R32.1 U9.9 | length 23.8
  Top Layer w0.3: U9.9 74.275,14.775 75,15.5 81.5,15.5 82.35,14.65 82.35,8.15 83.5,7 84.73,7 H8.1 R32.1
NetJ1_C2: J1.C2 R7.1 U12.7 | length 20.5
  Top Layer w0.3: v1(98,19) 99,19 103.83,14.17 J1.C2 104,13.245 v1(104,11.5)
  Bottom Layer w0.3: R7.1 98,8.5 99,9.5 102,9.5 v1(104,11.5) ; v1(98,19) 98.635,19.635 U12.7
NetQ1_1: Q1.1 R11.2 R20.1 | length 4.5
  Bottom Layer w0.3: R11.2 R20.1 Q1.1
NetQ2_1: Q2.1 R14.2 R24.1 | length 3.9
  Bottom Layer w0.3: R14.2 R24.1 Q2.1
NetQ3_1: Q3.1 R12.2 R21.1 | length 3.9
  Bottom Layer w0.3: R12.2 R21.1 Q3.1
NetQ3_2: Q3.2 XS3.2 | length 37.8
  Top Layer w0.3: XS3.2 5.213,34.057 5.443,34.057 v1(5.5,34) ; v1(12,34.5) 18.5,34.5 23.5,29.5 25.5,29.5 26.5,30.5 v1(29.5,30.5)
  Bottom Layer w0.3: v1(5.5,34) 11.439,34 11.939,34.5 v1(12,34.5) ; Q3.2@29.85,30.5 Q3.2@36.15,30.5
NetQ4_1: Q4.1 R16.1 R17.2 | length 5.6
  Bottom Layer w0.3: Q4.1 5.55,38.5 6.5,38.5 7.2,37.8 R17.2 R16.1
NetQ5_1: Q5.1 R19.2 R25.1 | length 3.9
  Bottom Layer w0.3: R19.2 R25.1 Q5.1
NetQ5_2: Q5.2 XS4.2 | length 45.3
  Bottom Layer w0.3: XS4.2 2.02,31.75 3.25,31.75 3.5,31.5 3.5,27 6.5,24 28.805,24 28.83,23.975 30.87,23.975 30.895,24 33,24 34.5,22.5 ; Q5.2@29.85,22.5 34.5,22.5 ; Q5.2@36.15,22.5 34.5,22.5
NetQ6_1: Q6.1 R26.2 | length 15.1
  Top Layer w0.3: v1(51.5,8) 52.749,8 53.249,7.5 v1(55.871,7.5)
  Bottom Layer w0.3: Q6.1 50.55,13.05 49.5,12 49.5,10 v1(51.5,8) ; v1(55.871,7.5) 55.928,7.557 55.928,8.528 R26.2
NetQ6_3: Q6.3 U13.3 | length 4.9
  Top Layer w0.3: U13.3 50.1,11.4 v1(50.5,11)
  Bottom Layer w0.3: v1(50.5,11) 51.5,12 Q6.3
NetQ7_1: Q7.1 R27.2 | length 1.6
  Bottom Layer w0.3: R27.2 45.525,16.175 47.025,16.175 Q7.1
NetQ7_3: Q7.3 U13.2 | length 4.7
  Top Layer w0.3: v1(48.5,11) 48.9,11.4 U13.2
  Bottom Layer w0.3: Q7.3 48,11.561 48.5,11.061 v1(48.5,11)
NetQ8_1: Q8.1 R13.2 | length 2.2
  Bottom Layer w0.3: 8.15,47.45 8.175,47.475 10.275,47.475 R13.2
NetQ8_3: Q8.3 R17.1 | length 13.3
  Bottom Layer w0.3: R17.1 4.5,36 4,36.5 4,45.5 5.025,46.525 5.875,46.525
NetR1_1: R1.1 R15.2 U5.4 | length 15.7
  Top Layer w0.3: U5.4 17.2,45.7 18.5,47 21,47 22,48 22,49 22.7,49.7 R15.2 R1.1
NetR22_2: R22.2 R23.2 U13.52 | length 12.4
  Top Layer w0.3: R22.2 42.2,22.975 42.5,23.275 42.5,26 43.5,27 44.75,27 U13.52
NetR42_2: R42.2 U7.2 | length 3.1
  Top Layer w0.3: U7.2 23.237,34.938 23.237,32.062 R42.2
NetR43_2: R43.2 U16.2 | length 2.8
  Bottom Layer w0.3: U16.2 R43.2
NetR45_2: R45.2 R46.2 U13.51 | length 5.7
  Top Layer w0.3: R45.2 42.35,31.15 42.35,28.15 R46.2 U13.51
NetU3_1: U3.1 U13.41 | length 9.9
  Top Layer w1: U13.41 48.9,43.63 48.92,43.65 U3.1 ; U3.1@48.992,49.992 U3.1@49,50
NetU8_32: U8.32 U9.10 | length 18.1
  Top Layer w0.3: v1(65,15) 65.4,14.6 70.969,14.6 72.16,13.41 72.16,13.065 73.05,12.175 U9.10
  Bottom Layer w0.3: U8.32 62.2,17.8 v1(65,15)
PN6280_RXD: R23.1 TX0.1 U8.31 | length 25
  Top Layer w0.3: v1(40,20) R23.1
  Bottom Layer w0.3: v1(40,20) 40,19 40.5,18.5 44,18.5 46,20.5 46.5,20.5 ; TX0.1 46.5,20.5 ; U8.31 56,17 54,19 52,19 50.5,20.5 46.5,20.5
PN6280_TXD: D7.4 U13.55 | length 11.9
  Top Layer w0.3: v1(43.5,25.5) 43.5,23.581 43.781,23.3 U13.55
  Bottom Layer w0.2: v1(43.5,25.5) 44,26 50.383,26 50.5,26.117 D7.4
Q1: R10.2 U8.2 | length 71.9
  Bottom Layer w0.3: R10.2 10,21.5 9.604,21.104 9.604,13.225 11.328,11.5 21.449,11.5 28.099,18.15 36.65,18.15 38,19.5 38,22 38.5,22.5 41.5,22.5 42,22 42,20.5 42.704,19.796 43.296,19.796 45,21.5 52,21.5 52.874,20.626 60.824,20.626 61,20.45 U8.2
Q2: R5.2 U8.13 | length 89.8
  Top Layer w0.3: v1(64,32.5) 64,19 66.221,16.779 70.221,16.779 v1(71,16)
  Bottom Layer w0.3: R5.2 10.176,29.7 10,29.524 10,27.249 10.249,27 12.715,27 12.905,26.81 25.729,26.81 26.319,27.4 28.805,27.4 28.83,27.375 30.87,27.375 30.895,27.4 42.4,27.4 51.5,36.5 60,36.5 v1(64,32.5) ; U8.13 69.6,14.6 v1(71,16)
Q3: R4.2 U8.10 | length 92.3
  Bottom Layer w0.3: R4.2 11.5,46 13.5,48 23.124,48 24.5,49.376 37.124,49.376 38.5,48 38.5,40 40.518,37.982 65.518,37.982 72,31.5 72,20 69,17 U8.10
Q11: R6.2 U8.1 | length 69.2
  Top Layer w0.3: v1(41,21.5) 41,22.6 41.5,23.1 41.5,26 v1(42,26.5)
  Bottom Layer w0.3: R6.2 12,33 9,30 9,27.5 10.5,26 28.5,26 29,26.5 v1(42,26.5) ; v1(41,21.5) 41,20.469 42.469,19 43.5,19 45.5,21 51,21 52,20 59,20 59.5,19.5 60.05,19.5 60.2,19.35 U8.1
RESET: H6.5 R44.2 U8.29 | length 20.2
  Bottom Layer w0.3: H6.5 50.77,2.5 52,2.5 53,3.5 53,4.081 53.15,4.231 53.15,7.314 52.5,7.964 52.5,12 53,12.5 53.4,12.5 R44.2 53.5,13.5 54,14 55.4,15.4 U8.29
SCK: H6.3 U8.17 | length 33
  Top Layer w0.3: H6.3 49.58,1.15 68.15,1.15 v1(69,2)
  Bottom Layer w0.3: U8.17 65.8,3.7 67.5,2 v1(69,2)
SIM1_CLK: C13.2 R8.2 U13.10 | length 59.1
  Top Layer w0.3: U13.10 58.5,10.707 58.707,10.5 67.439,10.5 67.939,10 v1(68,10) ; v1(85.47,14.97) 88.5,18 v1(88.5,19.5)
  Bottom Layer w0.3: v1(68,10) 69.5,10 72,12.5 75,12.5 77,14.5 85,14.5 v1(85.47,14.97) ; v1(88.5,19.5) 89,19 89,6 91,4 C13.2 94.3,6.2 94.4,6.3 R8.2
SIM1_DATA: C14.2 R9.2 U13.8 | length 54.4
  Top Layer w0.3: U13.8 56.1,11.4 58,9.5 66,9.5 67.114,8.386 67.114,7.968 67.5,7.581 v1(67.5,7.5) ; v1(83.5,12.5) 85.207,12.5 89.15,16.443 89.15,20.769 89,20.919 v1(89,21) ; R9.2 C14.2 92.443,25.857 92.443,24.557 v1(92.5,24.5)
  Bottom Layer w0.3: v1(67.5,7.5) 69,7.5 72.396,10.896 75.896,10.896 77.5,12.5 v1(83.5,12.5) ; v1(89,21) v1(92.5,24.5)
SIM1_RST: C12.2 D2.3 R7.2 U13.9 | length 87.6
  Top Layer w0.3: U13.9 57.3,11.2 58.5,10 66.919,10 67.464,9.455 67.464,9.168 v1(68.066,8.566) ; v1(83.5,13.85) 85.596,13.85 v1(87.746,16) ; v1(99.5,6.5) 102,9 104,9 106.5,11.5 v1(106.5,23)
  Bottom Layer w0.3: v1(68.066,8.566) 69.066,8.566 72.5,12 75.5,12 77.35,13.85 v1(83.5,13.85) ; v1(87.746,16) 87.746,5.754 91,2.5 97.824,2.5 98,2.676 C12.2 R7.2 99.219,6.3 99.419,6.5 v1(99.5,6.5) ; D2.3 105.069,24.35 106.419,23 v1(106.5,23)
SIM1_VDD: C11.2 C17.2 D2.4 H9.2 J1.C1 pad.4 U12.8 U13.11 | length 107.8
  Top Layer w0.3: U13.11 59.7,11.3 60,11 68.081,11 v1(68.115,11.035) ; v1(84.5,15.5) 87,18 v1(87,19.5) ; v1(87,8.5) 89.5,11 ; pad.4 89.5,11 ; H9.2 91,12.5 89.5,11 ; v1(97.5,20) 105,20 105.07,19.93 J1.C1 105,13.345 v1(105,12)
  Bottom Layer w0.3: v1(68.115,11.035) 69.535,11.035 71.5,13 74.5,13 76.5,15 84,15 v1(84.5,15.5) ; v1(87,19.5) v1(87,8.5) 87,5.5 91,1.5 99.5,1.5 101,3 101,5 100.5,5.5 100.5,7.524 100.676,7.7 C11.2 101.564,7.764 102.264,7.764 105,10.5 v1(105,12) ; v1(97.5,20) C17.2 97.564,21.236 98.264,21.236 98.595,20.905 U12.8 99.6,24.1 99.876,24.376 100.774,24.376 D2.4
U11_CTRL: R49.2 U8.12 U11.5 | length 79.4
  Top Layer w0.3: U11.5 19.2,8.619 19.5,8.919 v1(19.5,9) ; v1(48.5,8) 49.85,8 50.5,8.65 52.806,8.65 53.456,8 55.321,8 55.471,8.15 56.525,8.15 57.175,7.5 58.5,7.5 59,8 65.5,8 67,6.5 68,6.5 69,7.5 v1(69,13.568)
  Bottom Layer w0.3: v1(19.5,9) 20.5,10 22.5,10 28.5,16 40.293,16 44.5,11.793 44.5,11 47.5,8 v1(48.5,8) ; U8.12 69.4,15.4 71,17 R49.2 72.3,15.3 72,15 71.256,15 69.825,13.568 v1(69,13.568)
UART0_CTS: D8.4 R45.1 | length 19.7
  Top Layer w0.3: v1(40.35,23.577) 40.35,26.15 39.5,27 39.5,30.5 40.2,31.2 R45.1
  Bottom Layer w0.2: v1(40.35,23.577) 40.423,23.577 41.05,22.95 41.994,22.95 42.544,22.4 D8.4
UART0_RTS: U8.26 U13.50 | length 51.4
  Top Layer w0.3: v1(39.5,21.5) 40.5,22.5 40.5,22.807 41,23.307 41,26.5 40,27.5 40,28.919 40.5,29.419 v1(40.5,29.5) ; v1(42,33.5) 43.5,32 43.5,29.6 43.676,29.424 43.924,29.424 43.926,29.426 44.724,29.426 U13.50 ; v1(46,11) 46.85,10.15 56.35,10.15 v1(57.5,9)
  Bottom Layer w0.3: v1(39.5,21.5) 39.5,20.65 39.35,20.5 39.35,17.65 v1(46,11) ; v1(40.5,29.5) 40.5,32 v1(42,33.5) ; v1(57.5,9) 57.5,9.061 57,9.561 57,12.824 57.176,13 U8.26
UART1_RXD: R2.1 U9.12 U14.11 | length 41
  Top Layer w0.3: v1(71,13.65) 71.057,13.593 71.057,13.011 71.386,12.682 71.386,12.264 71.561,12.089 71.561,11.939 71.7,11.8 71.7,10.407 71.8,10.307 72.193,10.307 72.752,9.748 74.162,9.748 U9.12 ; v1(83,16) 83.85,16 85.5,17.65 v1(85.5,19.5)
  Bottom Layer w0.3: v1(71,13.65) 71.057,13.593 71.557,13.593 71.6,13.55 71.9,13.55 72.35,14 74.207,14 76.207,16 v1(83,16) ; v1(85.5,19.5) 85.5,20 87.9,22.4 87.9,24.6 U14.11
UART1_TXD: U9.1 U14.12 | length 42.8
  Top Layer w0.3: U9.1 79.752,4.527 81.473,4.527 v1(81.5,4.5) ; v1(83.5,10) 84,10 89.85,15.85 89.85,21.65 v1(86,25.5)
  Bottom Layer w0.3: v1(81.5,4.5) 80.85,5.15 80.85,7.85 81.896,8.896 82.396,8.896 v1(83.5,10) ; v1(86,25.5) 85,26.5 85,35.5 86,36.5 87.7,36.5 U14.12
UART2_RXD: H7.3 R18.1 U9.14 | length 115.3
  Top Layer w0.3: v1(3.5,24) 3.5,26.5 v1(4.5,27.5) ; v1(52.5,4.5) v1(55.5,4.5) ; v1(56.5,6) 64.081,6 65.081,5 71.5,5 71.7,5.2 R18.1 71.7,6.093 71.8,6.193 72.193,6.193 73.095,7.095 U9.14
  Bottom Layer w0.3: H7.3 3.5,43.54 3.5,32.5 4.5,31.5 v1(4.5,27.5) ; v1(3.5,24) 3.5,17.207 12.045,8.662 12.045,5.676 13.221,4.5 26.324,4.5 26.5,4.324 26.5,4.276 29.126,1.65 37.32,1.65 41.226,5.556 41.226,5.645 43.456,7.876 44.624,7.876 46,6.5 51,6.5 52.5,5 v1(52.5,4.5) ; v1(55.5,4.5) 55.5,5 v1(56.5,6)
UART2_TXD: R3.1 U9.5 | length 14.1
  Top Layer w0.3: R3.1 71.7,2.907 71.8,2.807 72.193,2.807 73.15,1.85 74.35,1.85 77,4.5 77,8.5 78.135,9.635 U9.5
USR_LED: U8.24 U16.1 | length 7.3
  Bottom Layer w0.3: U16.1 57.675,5.675 60.2,8.2 U8.24
VBAT: C5.1 H7.1 pad.3 Q4.3 R16.2 U5.1 U11.1 XS3.1 XS4.1 | length 93.4
  Top Layer w0.3: pad.3 12,2 12.4,2.4 U11.1
  Top Layer w1: XS4.1 2.115,29.115 5,29.115 ; XS3.1 5,31.73 5,29.115 ; H7.1 7.5,44.62 v1(7.5,43) v1(7.5,40) 7.5,34.5 ; 7.27,34.73 7.5,34.5 ; C5.1@8.089,29 7.852,28.763 7.589,28.5 7.589,27.089 7,26.5 7,11 10.923,7.077 12.3,7.077 12.4,6.977 U11.1 ; C5.1@9,29 8,29 C5.1@7.885,29.115 ; C5.1@9.5,29 C5.1 10,29.35 10,36 12.1,38.1 U5.1 ; 5,29.115 7.5,29.115 C5.1@7.885,29.115 ; 7.5,34.5 7.5,29.5 C5.1@7.885,29.115
  Bottom Layer w0.3: Q4.3 7.119,43.3 7.419,43 v1(7.5,43) ; v1(7.5,40) 10.2,37.3 R16.2
pads on no net: J1.C6 U8.3 U8.6 U8.14 U8.19 U8.20 U8.22 U12.1 U12.2 U12.4 U12.5 U12.9 U13.5 U13.6 U13.13 U13.14 U13.15 U13.16 U13.18 U13.19 U13.21 U13.23 U13.24 U13.25 U13.26 U13.27 U13.28 U13.29 U13.31 U13.33 U13.34 U13.35 U13.36 U13.37 U13.38 U13.48 U13.49 U13.53 U13.54 U13.56 U13.58 U13.59 U13.60 U13.61 U13.- U14.5 U14.6 U14.7 U14.8 U14.9 U14.10 U14.13 U14.14 U14.15 U14.16 U14.19 U14.22 U14.- U15.4
copper on no net:
  other v2: 6,6 106,6 6,52 106,52

## Polygon pours and split planes (outlines as drawn)
GND on Bottom Layer "GND_L02_P019" (solid, pour order 19): -20,69.4 36.9,69.4 39.5,66.8 39.5,43.5 87.3,43.5 87.3,49 115.3,49 115.3,-8.1 116.1,-8.9 114.3,-10.7 -16.8,-10.7 -16.8,66.2

## Keep-outs
Keep-Out Layer:
  circle w0: c76.5,34 r11
  circle w0: c6,6 r3
  circle w0: c6,52 r3
  circle w0: c106,52 r3
  circle w0: c106,6 r3

## Other copper
Top Layer:
  region net GND: 104.713,14.015 104.187,14.015 104.187,14.17 104.16,14.307 104.082,14.422 99.252,19.252 99.137,19.33 99,19.357 98.35,19.357 98.283,19.424 98.099,19.5 97.995,19.5 97.919,19.627 97.927,19.643 104.713,19.643
  region net GND: 90.401,16 90.599,16 90.664,16.027 90.791,15.942 90.791,15.71 85.305,10.224 85.132,10.27 84.954,10.27 84.902,10.397 90.102,15.598 90.18,15.713 90.207,15.85 90.207,15.943 90.334,16.028
  region net GND: 66.757,8.239 66.757,7.968 66.784,7.831 66.861,7.715 67,7.577 67,7.401 67.076,7.217 67.217,7.076 67.401,7 67.599,7 67.783,7.076 67.924,7.217 68,7.401 68,7.599 67.924,7.783 67.783,7.924 67.599,8 67.586,8 67.47,8.115 67.47,8.386 67.593,8.401 67.642,8.282 67.782,8.142 67.966,8.066 68.165,8.066 68.349,8.142 68.49,8.282 68.516,8.347 68.643,8.321 68.643,7.648 67.852,6.857 67.148,6.857 65.752,8.252 65.637,8.33 65.5,8.357 59.117,8.357 59,8.401 59,8.599 58.924,8.783 58.783,8.924 58.599,9 58.401,9 58.217,8.924 58.098,8.805 57.99,8.877 58,8.901 58,9.024 58,9.099 58.117,9.143 65.852,9.143
  region net GND: 56.923,7.248 57.039,7.17 57.175,7.143 58.5,7.143 58.637,7.17 58.752,7.248 59.148,7.643 65.352,7.643 66.521,6.474 66.473,6.357 65.35,6.357 65.283,6.424 65.099,6.5 64.901,6.5 64.717,6.424 64.576,6.283 64.548,6.217 64.399,6.187 64.333,6.252 64.217,6.33 64.081,6.357 61.669,6.357 61.591,6.484 61.592,6.485 61.616,6.507 61.783,6.576 61.924,6.717 62,6.901 62,7.099 61.924,7.283 61.783,7.424 61.599,7.5 61.401,7.5 61.217,7.424 61.076,7.283 61,7.099 61,7.007 56.264,7.007 56.212,7.134 56.295,7.217 56.371,7.401 56.371,7.599 56.356,7.634 56.464,7.706
  region net GND: 51.833,5.247 53.249,5.247 53.398,5.098 53.513,5.02 53.65,4.993 54.964,4.993 55.032,4.866 55.025,4.857 52.85,4.857 52.783,4.924 52.599,5 52.401,5 52.217,4.924 52.076,4.783 52,4.599 52,4.401 52.076,4.217 52.217,4.076 52.401,4 52.599,4 52.783,4.076 52.85,4.143 55.15,4.143 55.217,4.076 55.401,4 55.599,4 55.783,4.076 55.924,4.217 56,4.401 56,4.599 55.924,4.783 55.841,4.866 55.894,4.993 63.876,4.993 65.121,3.748 65.237,3.67 65.374,3.643 69.741,3.643 69.85,3.6 69.85,3.357 68.5,3.357 68.363,3.33 68.248,3.252 67.352,2.357 58.674,2.357 58.64,2.484 58.737,2.54 58.96,2.763 59.118,3.037 59.2,3.342 59.2,3.658 59.118,3.963 58.96,4.237 58.737,4.46 58.463,4.618 58.158,4.7 57.842,4.7 57.537,4.618 57.263,4.46 57.04,4.237 56.882,3.963 56.8,3.658 56.8,3.342 56.882,3.037 57.04,2.763 57.263,2.54 57.36,2.484 57.326,2.357 53.148,2.357 51.373,4.132 51.257,4.21 51.12,4.237 51.113,4.237 51.079,4.364 51.187,4.426 51.383,4.623 51.522,4.863 51.594,5.131 51.594,5.201 51.721,5.269
  region net GND: 71.514,4.536 71.516,4.52 71.352,4.357 65.521,4.357 65.353,4.526 65.401,4.643 71.459,4.643
  region net GND: 51.931,6.293 55.943,6.293 56.028,6.166 56,6.099 56,5.901 56.028,5.834 55.943,5.707 53.798,5.707 53.649,5.856 53.533,5.933 53.396,5.96 51.98,5.96 51.741,6.2 51.794,6.313 51.802,6.319
  region net GND: 47.262,3.406 47.2,3.344 47.068,3.116 47,2.861 47,2.598 47.068,2.344 47.2,2.116 47.386,1.93 47.614,1.798 47.868,1.73 48.132,1.73 48.386,1.798 48.412,1.813 49.101,1.124 49.052,1.007 46.498,1.007 45.907,1.598 45.949,1.736 46.094,1.765 46.293,1.897 46.425,2.096 46.472,2.33 46.472,3.13 46.425,3.364 46.394,3.411 46.454,3.523 47.213,3.523
  region net GND: 33.55,50.975 35.794,50.975 35.794,50 35.818,49.817 35.889,49.647 36.001,49.501 37.794,47.708 37.794,45.744 37.667,45.719 37.611,45.853 37.499,45.999 32.87,50.628 32.87,50.872 33.292,51.294 33.55,51.294
  region net GND: 37.794,40.466 37.794,37 37.794,30.292 36.208,28.706 34.5,28.706 34.317,28.682 34.147,28.611 34.001,28.499 32.001,26.499 31.984,26.477 31.857,26.52 31.857,27.852 33.648,29.643 36,29.643 36.137,29.67 36.252,29.748 37.252,30.748 37.33,30.863 37.357,31 37.357,34.15 37.424,34.217 37.5,34.401 37.5,34.599 37.424,34.783 37.283,34.924 37.099,35 36.901,35 36.717,34.924 36.627,34.834 36.5,34.887 36.5,35.2 34.62,35.2 34.62,37.332 37.499,40.211 37.611,40.357 37.667,40.491
  region net GND: 34.5,17.495 34.5,17.401 34.576,17.217 34.717,17.076 34.901,17 34.995,17 37.031,14.964 36.966,14.85 33.206,14.85 33.206,16.325 33.206,18.5 33.189,18.626 33.31,18.686
  region net GND: 4.794,19.878 4.794,19.557 4.667,19.472 4.599,19.5 4.401,19.5 4.217,19.424 4.214,19.421 2.917,20.718 2.932,20.744 3,20.998 3,21.262 2.932,21.516 2.872,21.62 2.973,21.698
  region net GND: 195 vertices and 8 holes, not listed, extent 33.206,4.237 51.247,28.384
  region net GND: 1628 vertices and 255 holes, not listed, extent 0.51,0.51 111.49,57.49
  region net GND: 153 vertices and 3 holes, not listed, extent 21.322,0.51 45.868,22.023
  region net GND: 386 vertices and 15 holes, not listed, extent 7.706,1.706 36.178,42.294
Bottom Layer:
  pour cut-out: 46.955,39.2 46.955,37.2 50.955,37.2 50.955,39.2

## Silkscreen, mask and mechanical layers (free items; w line width, h text height)
Top Overlay:
  circle w0.2: c76.5,34 r11
  circle w0.2: c6,6 r3
  circle w0.2: c6,52 r3
  circle w0.2: c106,52 r3
  circle w0.2: c106,6 r3
  lines w0.2: 68.5,26.5 cw(c76.5,34) 84.475,26.473
  text "BATTERY" at 73.2,46.2 h1
  text "SIM1_VDD" at 93.2,8.367 h1
  text "GPS_VBAT" at 58.9,3.367 h1
  text "VBAT" at 10.7,1.2 h1
Bottom Overlay:
  text "+1.8V" at 73.8,39.7 h1
Mechanical 1:
  lines w0: 0,4 cw(c0,0) 4,0 108,0 cw(c112,0) 112,4 112,54 cw(c112,58) 108,58 4,58 cw(c0,58) 0,54